# EAGLE board PCB Layout (EAGLE 9.7.0)
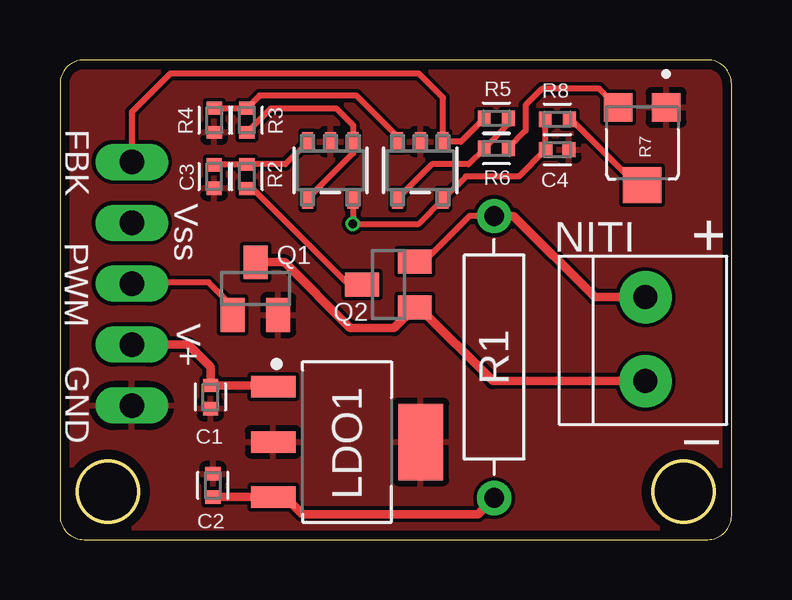
[diagram p0: board, top side]
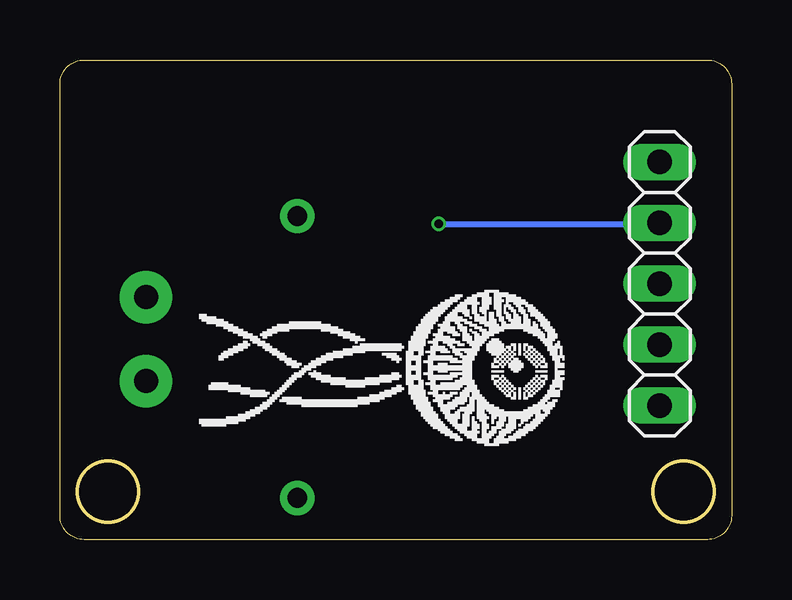
[diagram p1: board, bottom side, seen from below]

Size 28 x 20 mm. Coordinates in mm from the lower left corner, seen from the top.
Outline: 28,19 arc90 27,20 1,20 arc90 0,19 0,1 arc90 1,0 27,0 arc90 28,1 28,19
Outline: circle at 2,2 radius 1.27
Outline: circle at 26,2 radius 1.27
Copper layers (1*16): Top 0.035559375mm / dielectric 1.6mm / Bottom 0.035559375mm
Design rules "oshpark-2layer": minimum track width 6mil, minimum drill 10mil, track to track 6mil, track to pad 6mil, pad to pad 6mil, via to via 6mil, smd to smd 6mil, copper to edge 15mil, drill to drill 6mil, minimum pad ring 5mil, minimum via ring 5mil, stop-mask expansion 2.5mil, vias tented up to drill 0mil, thermal gap 10mil

## Footprints (pad centres in the part's own frame; a part is rotated, then mirrored left to right if it is on the bottom)
CAPC1005X60 = smd 0.56 x 0.629: 1 -0.485,0; 2 0.485,0
SOT230P700X170-4 = smd 1.86 x 0.898: 1 -3.075,2.3; 2 -3.075,0; 3 -3.075,-2.3 | smd 1.86 x 3.189: 4 3.075,0
1X2-3.5MM = drill 1 pad 2.184: 1 1.8,0; 2 -1.7,0
SOT23-5_OT_MCH-L = smd 0.8 x 0.457: 1 -1.2,0.95; 2 -1.2,0; 3 -1.2,-0.95; 4 1.2,-0.95; 5 1.2,0.95
1X05 = drill 1.016 long: 1 -5.08,0; 2 -2.54,0; 3 0,0; 4 2.54,0; 5 5.08,0
SOT23 = smd 1 x 1.4: 1 -0.95,-1.1; 2 0.95,-1.1; 3 0,1.1
RESAD1176W63L850D250B = drill 0.83 pad 1.43: 1 -5.88,0; 2 5.88,0
RESC1005X40 = smd 0.535 x 0.644: 1 -0.507,0; 2 0.507,0
TRIM_35WR10KLFTR = smd 1.2 x 1.2: 1 -1.6,1; 3 -1.6,-1 | smd 1.5 x 1.6: 2 1.65,0

## Placement (x,y rotation side)
C1  220nF  [CAPC1005X60]  6.27,5.94 90 top
C2  100nF  [CAPC1005X60]  6.38,2.26 270 top
C3  470nF  [CAPC1005X60]  6.43,15.14 90 top
C4  470nF  [CAPC1005X60]  20.73,16.26 180 top
LDO1  LM7805_SOT223  [SOT230P700X170-4]  11.97,4.07 0 top
NITI  1X2-3.5MM  [1X2-3.5MM]  24.41,8.41 270 top
OA1  MCP6006T-E/OTSOT23-5_OT_MCH-L  [SOT23-5_OT_MCH-L]  11.28,15.39 270 top
OA2  MCP6006T-E/OTSOT23-5_OT_MCH-L  [SOT23-5_OT_MCH-L]  15.02,15.39 270 top
PIN_HD  PINHD-1X05_1X05M  [1X05]  3,10.67 270 bottom
Q1  BSS123  [SOT23]  8.15,10.47 0 top
Q2  IRLML5203  [SOT23]  13.7,10.63 90 top
R1  [RESAD1176W63L850D250B]  18.1,7.61 270 top
R2  1K  [RESC1005X40]  7.8,15.14 270 top
R3  100K  [RESC1005X40]  7.8,17.49 270 top
R4  100K  [RESC1005X40]  6.43,17.49 90 top
R5  100K  [RESC1005X40]  18.2,17.57 180 top
R6  100K  [RESC1005X40]  18.2,16.31 0 top
R7  35WR10KLFTR  [TRIM_35WR10KLFTR]  24.27,16.42 270 top
R8  1K  [RESC1005X40]  20.73,17.53 180 top

## Library data of the parts
C1-C4 = Capacitor; CATEGORY: Capacitor
LDO1 PIN_HD = Tinkercad
NITI = adafruit
OA1 OA2 = MCP6006T_E_OT; COPYRIGHT: Copyright (C) 2024 Ultra Librarian. All rights reserved.; MANUFACTURER_PART_NUMBER: MCP6006T-E/OT; MFR_NAME: Microchip
Q1 = Transistor; CATEGORY: Transistor; DESCRIPTION: MOSFET N-CH 100V 0.17A SOT-23; DRAIN_CURRENT: 170mA; MANUFACTURER: ON Semiconductor; MPN: BSS123L; OPERATING_TEMP: -55°C ~ 150°C; PART_STATUS: Active; ROHS_COMPLIANT: Yes; SUB-CATEGORY: MOSFET; THERMALLOSS: 360mW; TYPE: N-Channel
Q2 = Transistor; CATEGORY: Transistor; DESCRIPTION: MOSFET P-CH 30V 3A SOT-23; DRAIN_CURRENT: 3A; MANUFACTURER: Infineon Technologies; MPN: IRLML5203TRPBF; OPERATING_TEMP: -55°C ~ 150°C; PART_STATUS: Active; ROHS_COMPLIANT: Yes; SUB-CATEGORY: MOSFET; THERMALLOSS: 1.25W; TYPE: P-Channel
R1-R6 R8 = Resistor; CATEGORY: Resistor; SUB-CATEGORY: Fixed
R7 = 35WR10KLFTR; MANUFACTURER: TT Electronics/BI; MAXIMUM_PACKAGE_HEIGHT: 1.8mm; PARTREV: D; STANDARD: Manufacturer Recommendations

## Nets
5V: C2.2 LDO1.3 R1.2
FBK: OA2.1 PIN_HD.1 R5.2
GND: C1.1 C2.1 C3.1 C4.1 LDO1.2 LDO1.4 OA1.2 OA2.2 PIN_HD.5 Q1.2 R4.1 R7.1
N$1: Q2.3 R2.2
N$2: R7.2 R8.1
N$3: OA2.4 R5.1 R6.1
N$4: OA2.3 R3.1 R4.2
N$6: R6.2 R7.3
N$7: OA1.1 OA1.4 R3.2
NI+: NITI.2 Q2.2 R1.1
NI-: NITI.1 Q1.3 Q2.1
PWM_PIN: PIN_HD.3 Q1.1
R2_TEST: C3.2 OA1.3 R2.1
V+: C1.2 LDO1.1 PIN_HD.4
VSS: C4.2 OA1.5 OA2.5 PIN_HD.2 R8.2

## Tracks (layer width: path | path; a pad name or v marks a point on that pad's centre or on a via)
5V
  Top 0.254: LDO1.3
  Top 0.356: R1.2 17.43,1.06 10.11,1.06 9.4,1.77 LDO1.3 | LDO1.3 C2.2
FBK
  Top 0.254: R5.2 16.71,16.59 OA2.1 15.97,18.42 14.97,19.43 4.59,19.43 3,17.83 PIN_HD.1
GND
  Top 0.152: LDO1.4
  pour Top: 1.01,0.13 26.99,0.13 27.15,0.14 27.3,0.18 27.44,0.24 27.56,0.33 27.67,0.44 27.76,0.56 27.82,0.7 27.86,0.85 27.87,1.01 27.87,18.99 27.86,19.15 27.82,19.3 27.76,19.44 27.67,19.56 27.56,19.67 27.44,19.76 27.3,19.82 27.15,19.86 26.99,19.87 1.01,19.87 0.85,19.86 0.7,19.82 0.56,19.76 0.44,19.67 0.33,19.56 0.24,19.44 0.18,19.3 0.14,19.15 0.13,18.99 0.13,1.01 0.14,0.85 0.18,0.7 0.24,0.56 0.33,0.44 0.44,0.33 0.56,0.24 0.7,0.18 0.85,0.14
N$1
  Top 0.254: Q2.3 12.04,10.63 8.04,14.63 R2.2
N$2
  Top 0.254: R7.2 24.05,14.77 21.29,17.53 R8.1
N$3
  Top 0.152: R5.1 18.7,17.32
  Top 0.254: 18.7,17.32 R6.1 17.03,15.65 15.5,15.65 14.07,14.22 OA2.4
N$4
  Top 0.254: R4.2 R3.1 8.32,18.51 12.36,18.51 14.07,16.8 OA2.3
N$6
  Top 0.254: R7.3 22.5,18.8 20.1,18.8 19.42,18.11 19.42,17.04 18.7,16.33 R6.2
N$7
  Top 0.254: OA1.4 10.33,14.21 12.23,16.11 OA1.1 12.23,17.28 11.52,17.98 8.8,17.98 R3.2
NI+
  Top 0.254: R1.1 17.08,13.49 15.18,11.59 Q2.2
  Top 0.356: R1.1 18.92,13.49 22.3,10.11 NITI.2
NI-
  Top 0.356: NITI.1 18.05,6.61 14.97,9.68 Q2.1 13.93,8.82 12.1,8.82 9.36,11.57 Q1.3
PWM_PIN
  Top 0.254: Q1.1 7.2,9.72 6.2,10.73 3.06,10.73 PIN_HD.3
R2_TEST
  Top 0.152: C3.2 6.45,15.65
  Top 0.254: OA1.3 9.39,15.65 R2.1 6.45,15.65
V+
  Top 0.152: 8.83,6.43 LDO1.1
  Top 0.356: PIN_HD.4 5.35,8.13 6.27,7.21 C1.2 8.83,6.43
VSS  (via drill 0.35)
  Top 0.152: 20.23,16.28 C4.2
  Top 0.254: R8.2 20.23,16.28 | OA1.5 12.21,14.18 v12.21,13.16 14.95,13.16 OA2.5 16.92,15.14 19.13,15.14 C4.2
  Bottom 0.254: v12.21,13.16 3.05,13.16 PIN_HD.2

## Text on the board
tNames: FBK | Vss | PWM | + | V+ | GND | _